# EAGLE board placa (EAGLE 7.6.0)
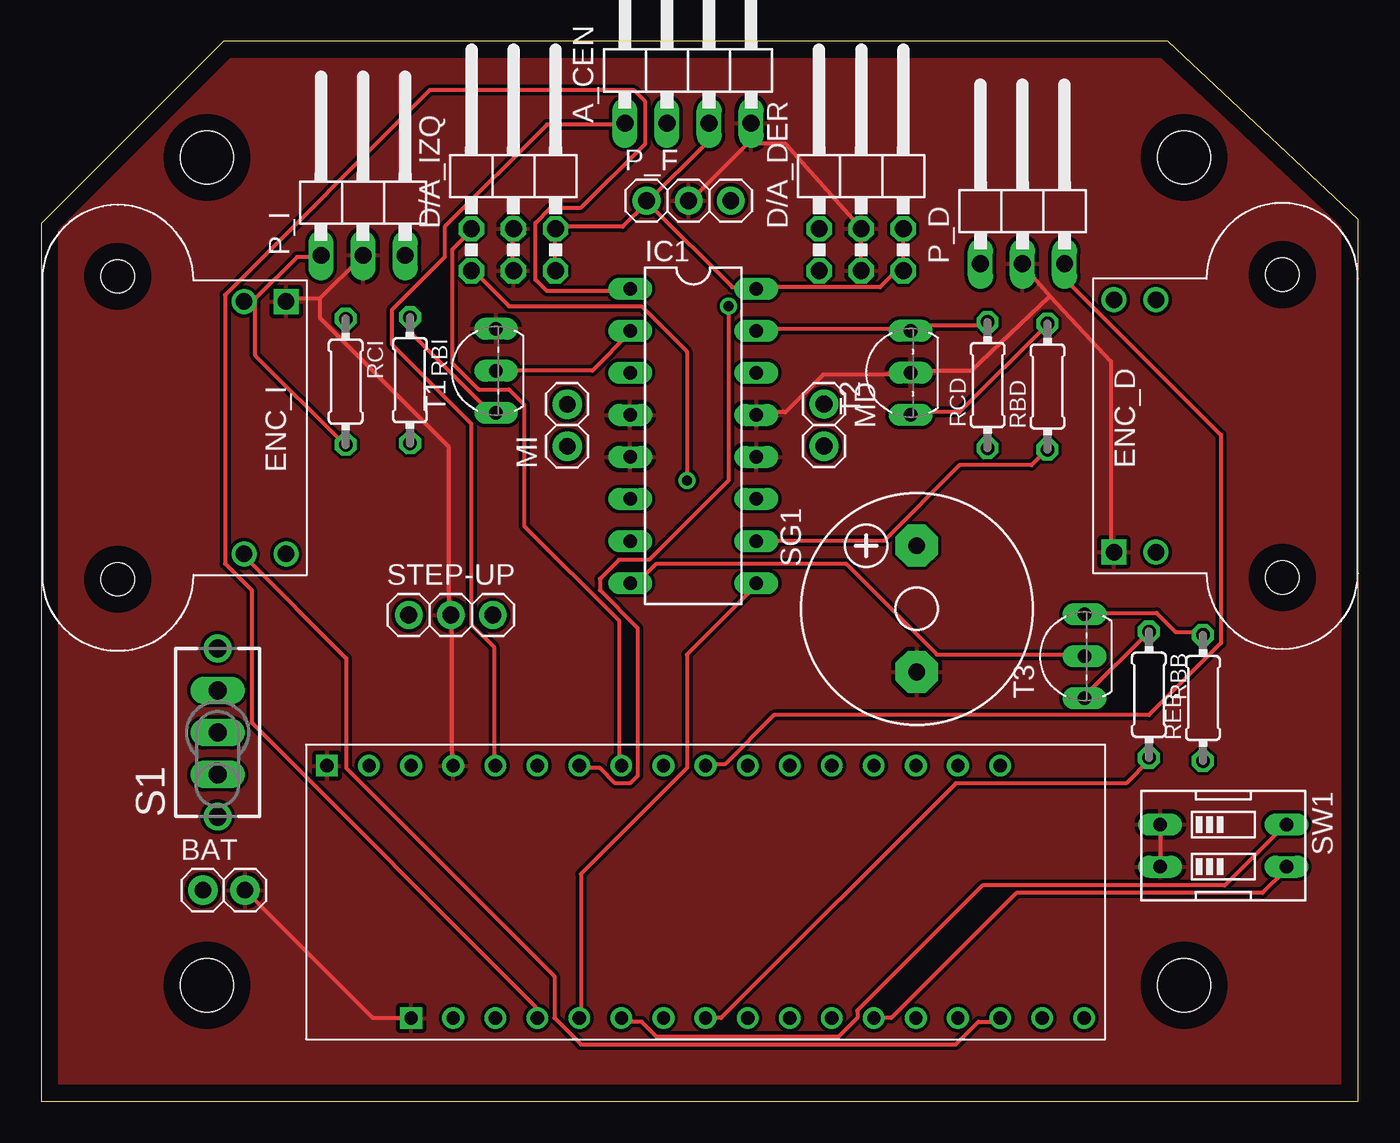
[diagram p0: board, top side]
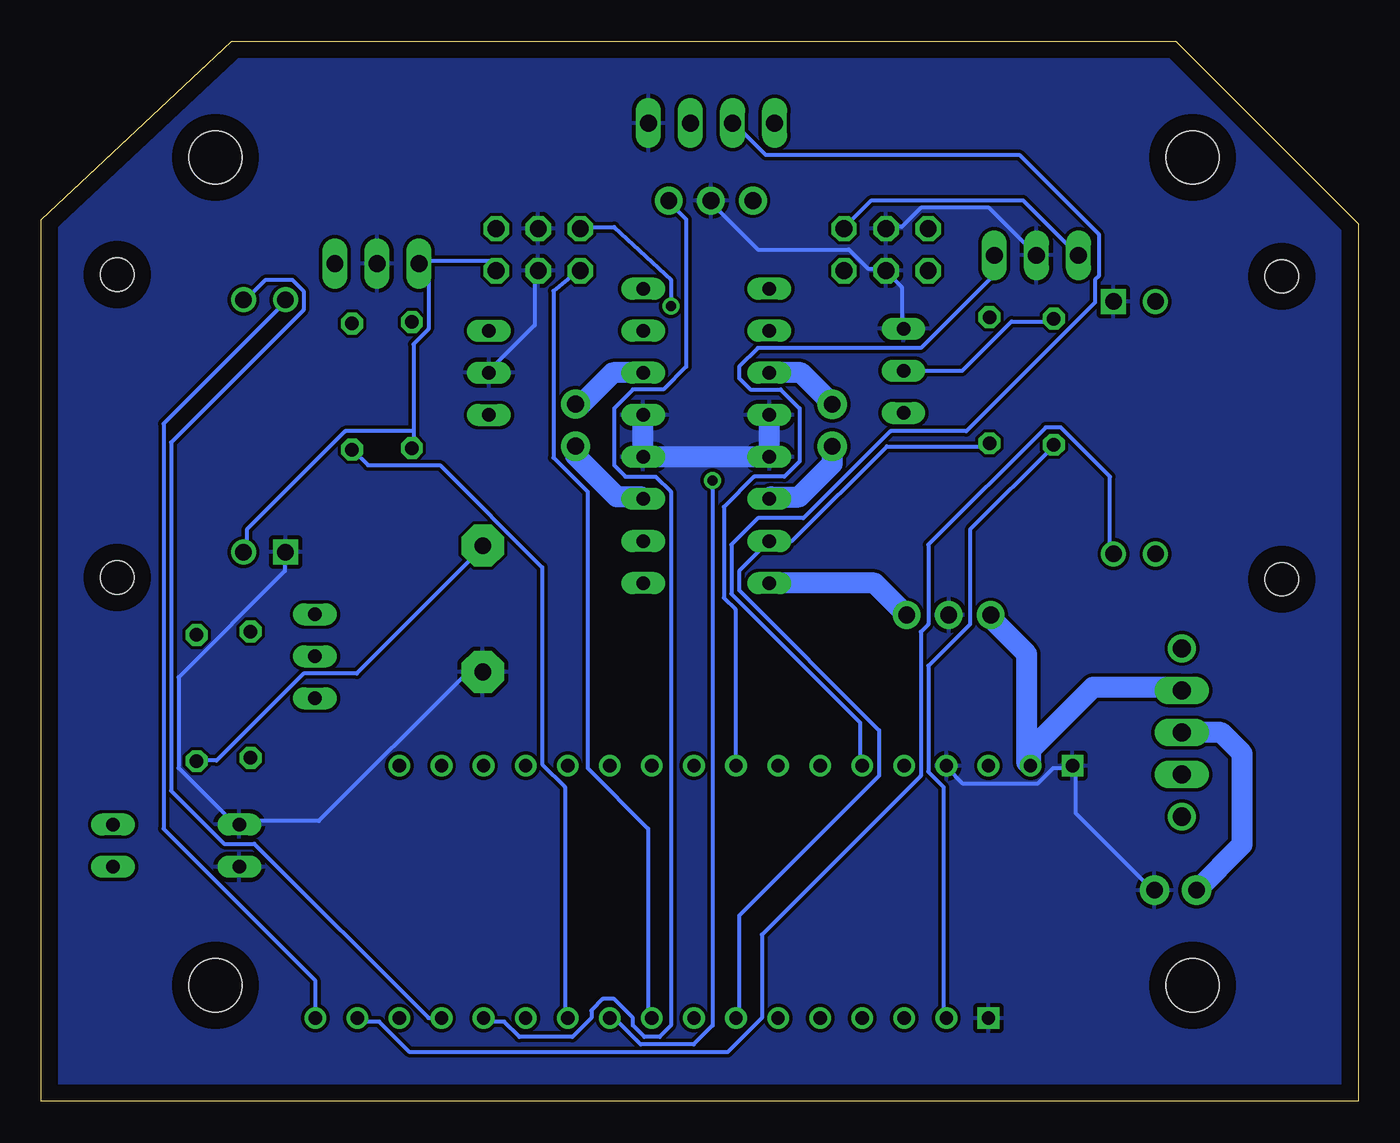
[diagram p1: board, bottom side, seen from below]

Size 79.5 x 64 mm. Coordinates in mm from the lower left corner, seen from the top.
Outline: 68,64 11,64 0,53 0,0 79.5,0 79.5,53.25 68,64
Copper layers (1*16): Top 0.035mm / dielectric 1.5mm / Bottom 0.035mm
Design rules "default": minimum track width 10mil, minimum drill 24mil, track to track 8mil, track to pad 8mil, pad to pad 8mil, via to via 8mil, smd to smd 8mil, copper to edge 40mil, drill to drill 8mil, minimum pad ring 10mil, minimum via ring 8mil, stop-mask expansion 4mil, vias tented up to drill 0mil, thermal gap 10mil
Holes 3.2 mm at 10,7 69,7 69,57 10,57

## Footprints (pad centres in the part's own frame; a part is rotated, then mirrored left to right if it is on the bottom)
1X04/90 = drill 1.016 long: 1 -3.81,-3.81; 2 -1.27,-3.81; 3 1.27,-3.81; 4 3.81,-3.81
1X02 = drill 1.016 pad 1.778: 1 -1.27,0; 2 1.27,0
2X03/90 = drill 1.016 octagon: 1 -2.54,-6.35; 2 -2.54,-3.81; 3 0,-6.35; 4 0,-3.81; 5 2.54,-6.35; 6 2.54,-3.81
POLOLU_ENCODER = drill 1: A 7.62,3.81; B 7.62,6.35; VCC -7.62,3.81 | drill 1 square: GND -7.62,6.35 | hole 2: -9.144,-3.81; 9.144,-3.81
DIL16 = drill 0.813 long: 1 -8.89,-3.81; 2 -6.35,-3.81; 3 -3.81,-3.81; 4 -1.27,-3.81; 5 1.27,-3.81; 6 3.81,-3.81; 7 6.35,-3.81; 8 8.89,-3.81; 9 8.89,3.81; 10 6.35,3.81; 11 3.81,3.81; 12 1.27,3.81; 13 -1.27,3.81; 14 -3.81,3.81; 15 -6.35,3.81; 16 -8.89,3.81
1X03/90 = drill 1.016 long: 1 -2.54,-3.81; 2 0,-3.81; 3 2.54,-3.81
1X03 = drill 1.016 pad 1.676: 1 -2.54,0; 2 0,0; 3 2.54,0
0204/7 = drill 0.813 octagon: 1 -3.81,0; 2 3.81,0
TL3XYO = drill 1.1 pad 1.422 long: 1 -2.54,0; 2 0,0; 3 2.54,0 | drill 1.1 pad 1.676: M1 -5.08,0; M2 5.08,0
F/CM12P = drill 1.016 pad 2.54 octagon: + 3.81,0; - -3.81,0
EDG-02 = drill 0.813 long: 1 -1.27,-3.81; 2 1.27,-3.81; 3 1.27,3.81; 4 -1.27,3.81
TO92-BEC = drill 0.813 long: B -2.54,0; C 2.54,0; E 0,0
A-STAR_LV = drill 0.8: 0 -3.81,-34.29; 1 -3.81,-31.75; 2 -3.81,-29.21; 3 -3.81,-26.67; 3V3 -3.81,1.27; 4 -3.81,-24.13; 5 -3.81,-21.59; 5V -3.81,3.81; 6 -3.81,-19.05; 7 -3.81,-16.51; 8 -3.81,-13.97; 9 -3.81,-11.43; 10 -3.81,-8.89; 11 -3.81,-6.35; 12 -3.81,-3.81; 13 -3.81,-1.27; +BAT 11.43,8.89; A0 11.43,1.27; A1 11.43,-1.27; A2 11.43,-3.81; A3 11.43,-6.35; A4 11.43,-8.89; A5 11.43,-11.43; AREF 11.43,-13.97; GND2 11.43,3.81; MISO 11.43,-26.67; MOSI 11.43,-24.13; RST 11.43,-29.21; RXL 11.43,-19.05; SCK 11.43,-21.59; TSL 11.43,-16.51; VIN 11.43,6.35 | drill 0.8 square: -BAT 11.43,11.43; GND -3.81,6.35

## Placement (x,y rotation side)
A_CEN  [1X04/90]  39.04,62.88 0 top
BAT  [1X02]  11.02,12.75 0 top
D/A_DER  [2X03/90]  49.5,56.5 0 top
D/A_IZQ  [2X03/90]  28.5,56.5 0 top
ENC_D  POLOLU_ENCODER  [POLOLU_ENCODER]  71.11,40.78 90 top
ENC_I  POLOLU_ENCODER  [POLOLU_ENCODER]  8.42,40.67 270 top
IC1  L293D  [DIL16]  39.36,40.18 270 top
MD  [1X02]  47.25,40.83 270 top
MI  [1X02]  31.75,40.82 90 top
P_D  [1X03/90]  59.24,54.39 0 top
P_F  [1X03]  39.08,54.39 0 top
P_I  [1X03/90]  19.42,54.89 0 top
RBB  [0204/7]  66.87,24.55 270 top
RBD  [0204/7]  60.75,43.16 90 top
RBI  [0204/7]  22.25,43.54 270 top
RCD  [0204/7]  57.13,43.25 90 top
RCI  [0204/7]  18.37,43.45 270 top
REB  [0204/7]  70.13,24.35 90 top
S1  TL39YO  [TL3XYO]  10.64,22.27 90 top
SG1  F/CM12P  [F/CM12P]  52.85,29.74 90 top
STEP-UP  [1X03]  24.72,29.36 0 top
SW1  [EDG-02]  71.36,15.44 270 top
T1  [TO92-BEC]  27.45,44.11 90 top
T2  [TO92-BEC]  52.48,43.99 90 top
T3  [TO92-BEC]  62.98,26.87 90 top
U$1  A-STAR_LV  [A-STAR_LV]  28.67,8.83 90 top

## Library data of the parts
A_CEN BAT D/A_DER D/A_IZQ MD MI P_D P_F P_I STEP-UP = pinhead
ENC_D ENC_I U$1 = Personalizado
IC1 = st-microelectronics; MPN: L293D; OC_FARNELL: 9589619; OC_NEWARK: 56P8249
RBB RBD RBI RCD RCI REB = eagle-ltspice; SPICEMODEL: NONE; SPICEPREFIX: R
S1 = switch
SG1 = buzzer; OC_FARNELL: unknown; OC_NEWARK: unknown
SW1 = special
T1-T3 = transistor

## Nets
+5V: A_CEN.3 D/A_DER.5 D/A_DER.6 D/A_IZQ.5 D/A_IZQ.6 ENC_D.VCC ENC_I.VCC IC1.16 P_D.1 P_F.1 P_I.1 RCD.1 RCI.2 U$1.5V
+9V: IC1.8 STEP-UP.3 T3.E
GND: A_CEN.4 BAT.2 D/A_DER.3 D/A_DER.4 D/A_IZQ.3 D/A_IZQ.4 ENC_D.GND ENC_I.GND IC1.4 IC1.5 IC1.12 IC1.13 P_D.2 P_F.2 P_I.2 SG1.- STEP-UP.2 SW1.1 SW1.2 T1.C T2.E U$1.-BAT U$1.GND U$1.GND2
N$1: BAT.1 S1.2
N$2: IC1.2 RCI.1 T1.E
N$3: RBI.1 T1.B
N$4: RBD.2 T2.B
N$5: IC1.15 RCD.2 T2.C
N$6: IC1.11 MD.2
N$7: IC1.14 MD.1
N$8: IC1.7 RBI.2 U$1.10
N$9: IC1.3 MI.2
N$10: IC1.6 MI.1
N$11: IC1.10 RBD.1 U$1.6
N$12: REB.2 T3.C
N$13: REB.1 SG1.+
N$14: RBB.1 T3.B
N$15: ENC_I.A U$1.2
N$16: ENC_D.B U$1.0
N$17: ENC_I.B U$1.1
N$18: IC1.9 U$1.12
N$19: SW1.3 U$1.5
N$20: SW1.4 U$1.11
N$21: RBB.2 U$1.9
N$22: ENC_D.A U$1.3
N$23: IC1.1 U$1.13
N$24: P_F.3 U$1.4
N$25: D/A_IZQ.1 U$1.7
N$26: D/A_DER.1 U$1.8
N$27: A_CEN.1 U$1.A0
N$29: D/A_IZQ.2 U$1.A3
N$30: P_I.3 U$1.A4
N$31: P_D.3 U$1.A5
N$33: A_CEN.2 U$1.A1
N$34: D/A_DER.2 U$1.A2
V+: S1.3 STEP-UP.1 U$1.+BAT

## Tracks (layer width: path | path; a pad name or v marks a point on that pad's centre or on a via)
+5V
  Top 0.254: 12.92,48.47 12.23,48.47 ENC_I.VCC 12.92,48.47 | 12.92,48.47 15.43,50.98 16.8,50.98 P_I.1 | 12.92,48.47 12.92,45.04 18.18,39.78 RCI.2 | D/A_IZQ.5 30.98,50.29 30.98,52.58 D/A_IZQ.6 31.21,52.81 35.09,52.81 36.46,54.18 P_F.1 | P_F.1 36.69,54.18 41.72,49.15 43.09,49.15 IC1.16 43.32,49.15 50.64,49.15 52.01,50.52 D/A_DER.5 52.01,50.75 52.01,53.04 D/A_DER.6 | A_CEN.3 40.12,58.98 40.12,57.84 36.69,54.41 P_F.1
  Bottom 0.254: U$1.5V 25.03,5.03 25.03,18.98 25.95,19.89 25.95,26.29 23.43,28.81 23.43,34.52 18.41,39.55 RCI.2 | 57.04,40.46 57.04,45.72 56.12,46.64 56.12,50.75 | 57.04,40.46 57.04,39.55 RCD.1 | 56.12,50.75 56.12,50.98 56.58,51.44 P_D.1 56.12,50.75 | 57.04,40.46 61.15,40.46 67.1,34.52 67.1,33.38 ENC_D.VCC | 56.12,50.75 52.24,50.75 D/A_DER.5 | P_I.1 17.03,51.21 20.23,54.41 29.38,54.41 30.98,52.81 D/A_IZQ.6
+9V
  Top 0.254: T3.E 62.75,26.98 54.07,26.98 48.58,32.46 37.15,32.46 35.78,31.09 IC1.8
  Bottom 1.27: STEP-UP.3 29.19,31.29 IC1.8
GND
  Top 0.254: U$1.GND2 24.81,20.35 24.81,29.26 STEP-UP.2 24.58,29.49 24.58,39.55 16.8,47.32 16.8,48.47 | U$1.GND 22.29,5.03 20.01,5.03 12.46,12.57 BAT.2 | SW1.2 67.55,16.69 SW1.1 | 60.9,48.61 59.32,50.44 P_D.2 | 60.9,48.61 64.58,44.68 64.58,33.38 ENC_D.GND | D/A_IZQ.4 28.46,52.58 28.46,50.29 D/A_IZQ.3 | 16.8,48.47 14.98,48.47 ENC_I.GND | 16.8,48.47 19.32,50.98 P_I.2 | 42.64,57.84 42.64,58.98 A_CEN.4 42.64,57.84 | 42.64,57.84 39.21,54.41 P_F.2 | D/A_DER.3 49.49,50.75 49.49,52.54 D/A_DER.4 48.99,53.27 44.92,57.84 42.64,57.84 | IC1.13 43.32,41.61 44.92,41.61 47.21,43.89 52.47,43.89 T2.E 52.69,44.12 56.17,44.12 60.9,48.61
  Bottom 0.254: U$1.GND2 24.81,20.12 23.89,19.2 19.32,19.2 18.41,20.12 17.26,20.12 U$1.-BAT 17.03,20.12 17.03,17.38 12.46,12.8 BAT.2 | SG1.- 52.92,25.83 53.84,25.83 62.75,16.92 67.33,16.92 SW1.1 67.55,16.92 68.01,16.92 71.21,20.12 71.21,25.6 64.81,32.01 64.81,33.15 ENC_D.GND | T1.C 27.55,46.87 27.55,49.15 28.46,50.06 D/A_IZQ.3 28.69,50.29 29.61,50.29 30.75,51.44 36.24,51.44 38.98,54.18 P_F.2 | D/A_IZQ.4 28.46,52.81 27.55,52.81 26.41,53.95 22.29,53.95 19.55,51.21 P_I.2 | T2.E 52.47,44.12 49.72,46.87 49.72,50.02 D/A_DER.3
  Bottom 1.27: IC1.13 IC1.12 IC1.5 IC1.4
  pour Bottom: 0,53 11,64 68,64 80,53 80,0 0,0
  pour Top: 0,53 11,64 68,64 80,53 80,0 0,0
N$1
  Bottom 1.27: BAT.1 7,15.5 7,21 8.27,22.27 S1.2
N$2
  Top 0.254: T1.E 27.55,44.12 33.26,44.12 35.55,46.41 IC1.2
  Bottom 0.254: RCI.1 18.41,47.09 20.92,47.09 23.89,44.12 27.32,44.12 T1.E
N$3
  Top 0.254: RBI.1 22.29,47.32 22.29,46.41 27.32,41.38 T1.B
N$4
  Top 0.254: T2.B 52.69,41.61 55.44,41.61 60.7,46.87 RBD.2
N$5
  Top 0.254: IC1.15 43.32,46.64 52.47,46.64 T2.C 52.69,46.64 52.92,46.87 57.04,46.87 RCD.2
N$6
  Bottom 1.27: IC1.11 43.3,36.5 44.75,36.5 47.25,39 MD.2
N$7
  Bottom 1.27: IC1.14 45,44 46.9,42.1 MD.1
N$8
  Bottom 0.254: U$1.10 37.38,5.03 37.38,11.2 28.92,19.66 28.92,22.41 37.38,30.86 37.38,32.01 35.78,33.61 IC1.7 34.18,33.84 28.46,39.55 22.29,39.55 RBI.2
N$9
  Bottom 1.27: MI.2 33.65,43.99 IC1.3
N$10
  Bottom 1.27: IC1.6 35.42,36.5 33.75,36.5 31.75,38.5 MI.1
N$11
  Top 0.254: IC1.10 43.32,33.84 50.87,33.84 55.44,38.41 59.78,38.41 60.7,39.32 RBD.1
  Bottom 0.254: U$1.6 47.89,5.03 47.89,18.98 49.27,20.35 49.27,32.23 55.44,38.41 59.78,38.41 60.7,39.32 RBD.1
N$12
  Top 0.254: REB.2 70.07,28.35 68.47,28.35 67.33,29.49 62.98,29.49 T3.C
N$13
  Bottom 0.254: REB.1 70.07,20.58 68.92,20.58 63.67,25.83 60.47,25.83 52.92,33.38 SG1.+
N$14
  Top 0.254: T3.B 62.98,24.46 66.87,28.35 RBB.1
N$15
  Top 0.254: U$1.2 57.72,4.8 56.58,4.8 55.21,3.43 32.58,3.43 30.98,5.03 30.98,7.55 18.41,20.12 18.41,26.75 12.23,32.92 ENC_I.A
N$16
  Bottom 0.254: U$1.0 62.98,5.03 62.98,7.32 72.13,16.46 72.13,40.92 64.81,48.24 ENC_D.B
N$17
  Bottom 0.254: U$1.1 60.24,4.8 59.1,4.8 57.27,2.97 38.06,2.97 36.01,5.03 36.01,10.06 26.41,19.66 26.41,28.35 25.95,28.81 25.95,33.61 18.86,40.69 17.95,40.69 14.98,37.72 14.98,33.15 ENC_I.B
N$18
  Top 0.254: U$1.12 32.58,5.03 32.58,13.72 38.98,20.12 38.98,26.98 43.09,31.09 IC1.9
N$19
  Top 0.254: U$1.5 50.41,5.03 51.32,5.03 58.87,12.57 73.73,12.57 75.1,13.95 SW1.3
N$20
  Top 0.254: U$1.11 35.09,4.8 36.24,4.8 37.15,3.89 48.12,3.89 49.27,5.03 49.27,5.49 56.81,13.03 71.44,13.03 75.1,16.69 SW1.4
N$21
  Top 0.254: U$1.9 40.12,5.03 41.04,5.03 55.21,19.2 65.5,19.2 66.87,20.58 RBB.2
N$22
  Bottom 0.254: U$1.3 55.44,5.03 56.12,5.03 66.64,15.55 68.47,15.55 71.67,18.75 71.67,39.78 63.67,47.78 63.67,48.92 64.35,49.61 65.95,49.61 67.1,48.47 ENC_D.A
N$23
  Top 0.254: U$1.13 29.84,5.03 29.84,5.72 12.69,22.86 12.69,30.86 11.09,32.46 11.09,48.69 23.43,61.04 35.78,61.04 36.46,60.35 36.46,57.84 32.58,53.95 30.75,53.95 29.84,53.04 29.84,49.61 30.52,48.92 35.55,48.92 IC1.1
N$24
  Bottom 0.254: U$1.4 52.69,4.8 51.55,4.8 50.64,3.89 47.44,3.89 46.29,5.03 46.29,5.49 45.61,6.17 44.92,6.17 43.78,5.03 43.78,4.57 43.09,3.89 42.18,3.89 41.49,4.57 41.49,36.81 42.41,37.72 44.24,37.72 44.92,38.41 44.92,41.84 43.78,42.98 41.95,42.98 40.58,44.35 40.58,53.27 41.49,54.18 P_F.3
N$25  (via drill 0.61)
  Top 0.254: v38.98,37.49 38.98,45.27 36.24,48.01 28.23,48.01 26.18,50.06 D/A_IZQ.1
  Bottom 0.254: v38.98,37.49 38.98,4.57 40.12,3.43 43.32,3.43 44.69,4.8 45.15,4.8 U$1.7
N$26
  Bottom 0.254: U$1.8 42.87,5.03 42.87,16.46 46.52,20.12 46.52,36.81 48.58,38.86 48.58,48.92 47.23,50.02 D/A_DER.1
N$27
  Top 0.254: U$1.A0 27.32,20.35 27.32,27.43 25.95,28.81 25.95,40.92 21.15,45.72 21.15,47.78 24.35,50.98 24.35,52.81 30.52,58.98 35.09,58.98 A_CEN.1
N$29
  Top 0.254: U$1.A3 34.86,20.35 34.86,29.03 29.15,34.75 29.15,42.06 28.23,42.98 26.41,42.98 24.81,44.58 24.81,51.44 25.95,52.58 D/A_IZQ.2
N$30
  Bottom 0.254: U$1.A4 37.61,20.35 37.61,29.72 38.29,30.41 38.29,35.89 36.46,37.72 34.63,37.72 33.72,38.63 33.72,41.84 34.86,42.98 36.69,42.98 37.38,43.66 37.38,44.35 36.24,45.49 26.41,45.49 22.06,49.84 22.06,50.98 P_I.3
N$31
  Top 0.254: U$1.A5 40.12,20.35 41.27,20.35 44.24,23.32 66.87,23.32 71.21,27.66 71.21,40.24 61.84,49.61 61.84,50.44 P_D.3
N$33
  Bottom 0.254: U$1.A1 30.06,20.35 30.06,22.86 37.84,30.63 37.84,33.61 36.24,35.21 33.49,35.21 28.23,40.46 23.66,40.46 15.89,48.24 15.89,49.61 15.66,49.84 15.66,52.35 20.46,57.15 35.78,57.15 37.61,58.98 A_CEN.2
N$34  (via drill 0.61)
  Top 0.254: v41.49,48.01 41.49,37.49 36.69,32.69 34.86,32.69 33.72,31.55 33.72,30.86 36.01,28.58 36.01,19.66 35.55,19.2 34.63,19.2 33.72,20.12 32.58,20.12 U$1.A2
  Bottom 0.254: v41.49,48.01 41.49,49.61 44.92,52.79 47,52.79 D/A_DER.2
V+
  Bottom 1.27: S1.3 10.83,25 16,25 19.78,21.22 U$1.+BAT 20,20.48 20,27 22.18,29.18 STEP-UP.1